# Altium PCB PCB3.PcbDoc
Units mil, origin at the board's own origin, x right, y up, seen from the top; angles counter-clockwise.
Board outline 4694.4 x 2114.4 mil, 2 copper layers (Top Layer, Bottom Layer); 41 components, 24 nets, 101 pads, 3 vias.
Unrouted connection lines stored in the file: 1.
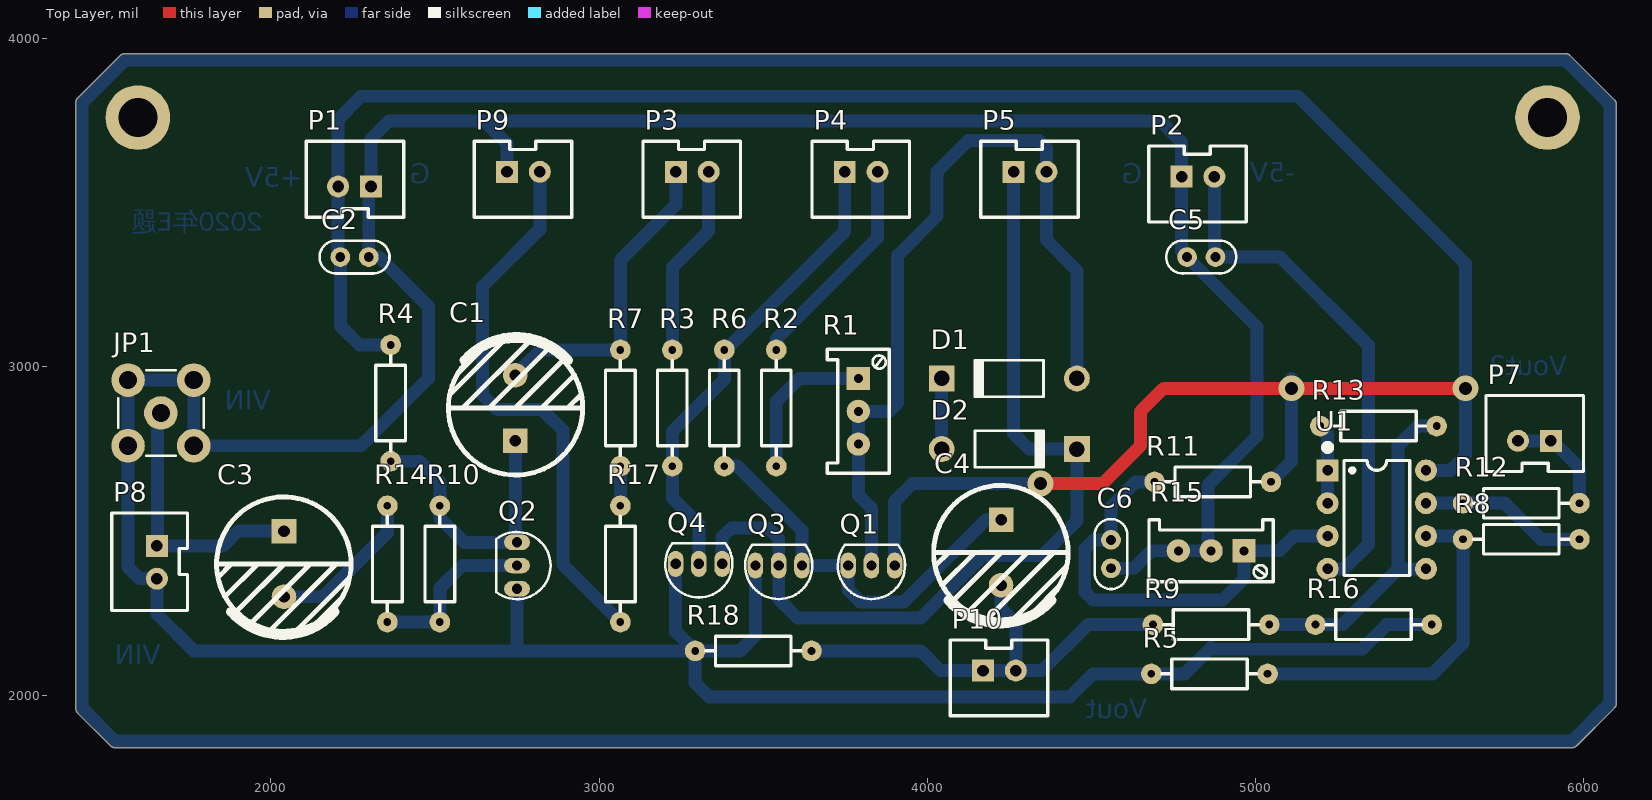
[diagram p0: Top Layer view]
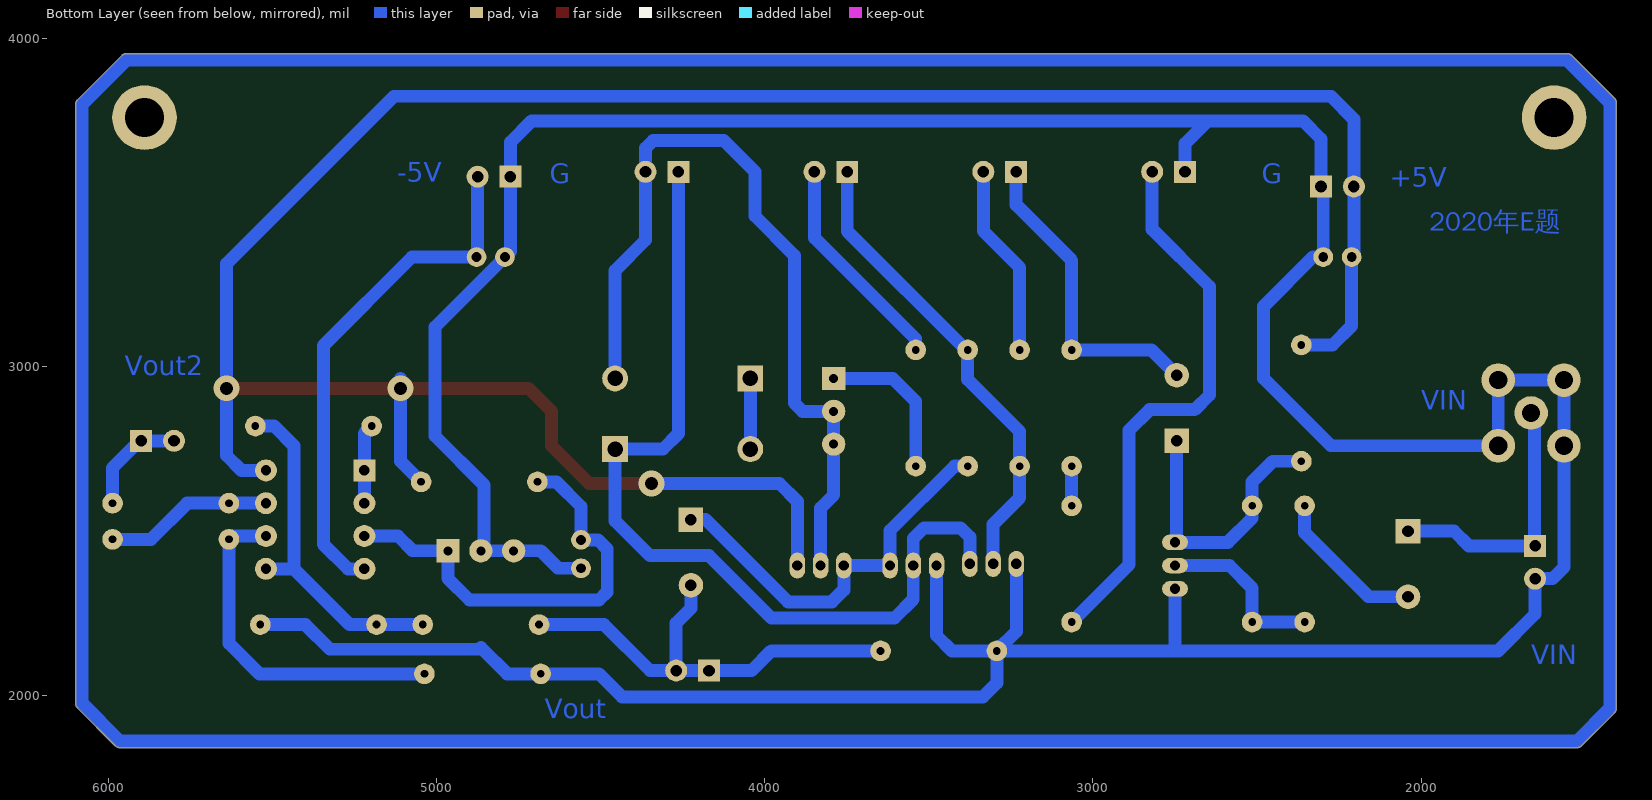
[diagram p1: Bottom Layer view, seen from below]
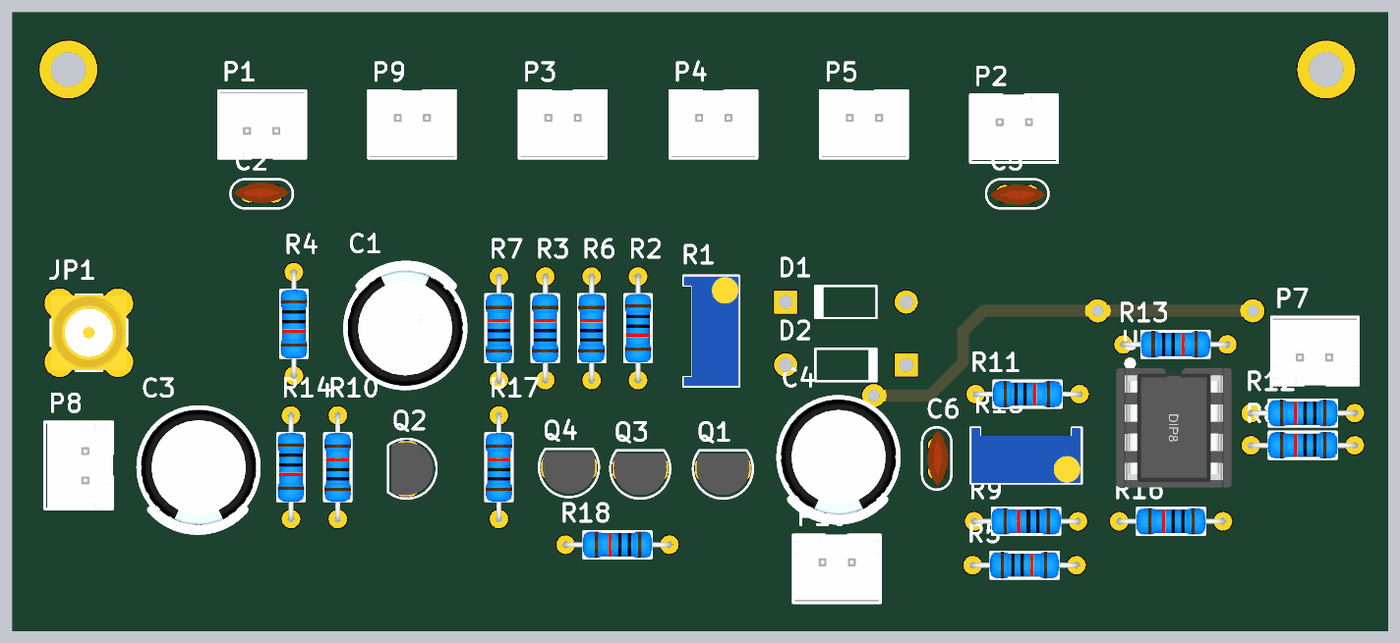
[diagram p2: 3D render of the assembled board from above, using the file's embedded part models]

## Layer stack, top to bottom
Top Solder: solder mask 0.4, Solder Resist, Dk 3.5
Top Layer: signal copper 1.4
Dielectric 1: dielectric 12.6, FR-4, Dk 4.8
Bottom Layer: signal copper 1.4
Bottom Solder: solder mask 0.4, Solder Resist, Dk 3.5

## Board outline
1511.08,1846.06 1411.06,1946.08 ccw(c1425,1960) 1411.08,1946.06 1411.07,1946.07 cw(c1425,1960) 1405.3,1960 1405.3,3805 cw(c1425,3805) 1411.07,3818.93 1411.06,3818.92 1541.08,3948.94 ccw(c1555,3935) 1541.06,3948.92 1541.07,3948.93 cw(c1555,3935) 1555,3954.7 5945,3954.7 cw(c5945,3935) 5958.93,3948.93 5958.92,3948.94 6093.94,3813.92 ccw(c6080,3800) 6093.92,3813.94 6093.93,3813.93 cw(c6080,3800) 6099.7,3800 6099.7,1975 cw(c6080,1975) 6093.93,1961.07 6093.94,1961.08 cw(c6080,1975) 6093.92,1961.06 6093.94,1961.08 5978.92,1846.06 ccw(c5965,1860) 5978.94,1846.08 5978.93,1846.07 cw(c5965,1860) 5965,1840.3 1525,1840.3 cw(c1525,1860) 1511.07,1846.07 1511.08,1846.06 cw(c1525,1860)

## Design rules (kind name [scope] priority, off if disabled: settings)
Clearance [All] p1: gap=10 ignorepadtopadclearanceinfootprint=FALSE except(0: Arc-Hole Track-Hole SMDPad-Hole THPad-Hole Via-Hole Fill-Hole Poly-Hole Region-Hole Text-Hole)
PolygonConnect [All] p1: connectstyle=Relief reliefconductorwidth=10 reliefentries=4 polygonreliefangle="90 Angle" airgapwidth=10
RoutingVias [All] p1: holewidth=28 width=50 viastyle="Through Hole" minholewidth=28 minwidth=50 maxholewidth=28 maxwidth=50
SolderMaskExpansion [All] p1: expansion=4
Width [All] p1: maxlimit=118.11 minlimit=39.37 preferedwidth=59.06
30 further rules are at their usual default settings.

## Components (designator, comment, footprint, x,y, rotation, side; value= is the part's Value field where it differs from the comment)
C1 "10uf" "CAP 5.0*10*16 - BK" 2745,2875 r90 top value=100pF
C2 "104" "CC 2.2*5" 2255,3335 r180 top value=100pF
C3 "10uf" "CAP 5.0*10*16 - BK" 2040,2400 r270 top value=100pF
C4 "10uF" "CAP 5.0*10*16 - BK" 4225,2435 r270 top value=100pF
C5 "104" "CC 2.2*5" 4835,3335 r0 top value=100pF
C6 "104" "CC 2.2*5" 4560,2430 r90 top value=100pF
D1 "Diode 1N4007" DO-41 4250,2965 r180 top
D2 "Diode 1N4007" DO-41 4250,2750 r0 top
JP1 "SMA WIFI 天线接口" SMA-KE-LI 1665,2860 r90 top
P1 "Header 2" XH2.54-LI-2P 2255,3550 r180 top
P2 "Header 2" XH2.54-LI-2P 4825,3580 r0 top
P3 "Header 2" XH2.54-LI-2P 3284.12,3594.7 r0 top
P4 "Header 2" XH2.54-LI-2P 3798.68,3594.7 r0 top
P5 "Header 2" XH2.54-LI-2P 4313.24,3594.7 r0 top
P7 "Header 2" XH2.54-LI-2P 5850,2775 r180 top
P8 "Header 2" XH2.54-LI-2P 1652.82,2405 r270 top
P9 "Header 2" XH2.54-LI-2P 2769.56,3594.7 r0 top
P10 "Header 2" XH2.54-LI-2P 4220,2075 r0 top
Q1 "NPN" TO92 3830,2395 r180 top
Q2 "NPN" TO92 2750,2395 r270 top
Q3 "PNP" TO92 3547.5,2395 r180 top
Q4 "NPN" TO92 3304.13,2400 r180 top
R1 "5K" 3296W 3790,2865 r270 top value=1K
R2 "1000k" AXIAL0.4-1/4W 3540,2875 r270 top value=1K
R3 "30K" AXIAL0.4-1/4W 3223.33,2875 r90 top value=1K
R4 "2k" AXIAL0.4-1/4W 2365,2890 r270 top value=1K
R5 "10k" AXIAL0.4-1/4W 4860,2065 r0 top value=1K
R6 "200k" AXIAL0.4-1/4W 3381.67,2875 r90 top value=1K
R7 "30k" AXIAL0.4-1/4W 3065,2875 r90 top value=1K
R8 "10k" AXIAL0.4-1/4W 5810,2475 r180 top value=1K
R9 "1k" AXIAL0.4-1/4W 4865,2215 r180 top value=1K
R10 "200k" AXIAL0.4-1/4W 2515,2400 r90 top value=1K
R11 "20k" AXIAL0.4-1/4W 4870,2650 r0 top value=1K
R12 "1k" AXIAL0.4-1/4W 5810,2585 r180 top value=1K
R13 "2K" AXIAL0.4-1/4W 5375,2820 r0 top value=1K
R14 "2K" AXIAL0.4-1/4W 2355,2400 r270 top value=1K
R15 "10k" 3296W 4865,2440 r180 top value=1K
R16 "2K" AXIAL0.4-1/4W 5360,2215 r180 top value=1K
R17 "100k" AXIAL0.4-1/4W 3065,2400 r90 top value=1K
R18 "2K" AXIAL0.4-1/4W 3470,2135 r180 top value=1K
U1 "TL082IDR" DIP8-300_MH 5370,2535 r0 top

## Footprints (in the part's own frame and the unit in brackets; to place one, negate y for a bottom-side part, rotate by r counter-clockwise, add the part's x,y. Pads: shape width x height; smd on the part's side, far side on the other; paste and mask are expansions set on the pad)
3296W [mm] "Precise Multi-Winding Adjustable Resistor"
  rect 1.8x1.8 hole 0.7: 1(-2.54,0)
  round 1.8 hole 0.7: 2(0,0) 3(2.54,0)
  silkscreen extent -4.8,-2.4 4.8,2.4, body extent -4.75,-2.4 4.75,2.4, height 2.9
AXIAL0.4-1/4W [mm] "脚距9mm，直径2.3mm"
  round 1.6 hole 0.6: 1(-4.5,0) 2(4.5,0)
  silkscreen extent -3.68,-1.14 3.68,1.14, body extent -4.72,-1.16 4.73,1.16, height 2.32
"CAP 5.0*10*16 - BK" [mm] "脚距5mm直径10mm高度16mm"
  rect 1.9x1.9 hole 0.9: 1(-2.54,0)
  round 1.9 hole 0.9: 2(2.54,0)
  silkscreen extent -5.19,-5.21 5.51,5.19, body extent -4.99,-5 5.02,5, height 16.26
"CC 2.2*5" [mil] "脚距2.2mm直径5mm      淘宝ID:黄晶宝石"
  round 60 hole 30: 1(-43.31,0) 2(43.31,0)
  silkscreen extent -107,-50 107,50, body extent -94,-40 95,32, height 194
DIP8-300_MH [mm] "带底座 9.4*7.6*3.8(长宽高）"
  rect 1.7x1.7 hole 0.8: 1(-3.81,3.81)
  round 1.7 hole 0.8: 2(-3.81,1.27) 3(-3.81,-1.27) 4(-3.81,-3.81) 5(3.81,-3.81) 6(3.81,-1.27) 7(3.81,1.27) 8(3.81,3.81)
  silkscreen extent -4.06,-4.32 2.54,5.84, body extent -5,-5.19 5,5.19, height 7.7
DO-41 [mm] "Diode, Axial; Body 5.2 x 2.7 mm (LxDia. max), Lead Dia. 0.86 mm (max)"
  round 2 hole 1.2: 1(-5.23,0)
  rect 2x2 hole 1.2: 2(5.23,0)
  silkscreen extent -2.65,-1.4 2.75,1.4
SMA-KE-LI [mm] "SMA 立式直插射频天线座     淘宝ID:黄晶宝石"
  round 2.6 hole 1.4 unplated: 1(0,0) 2(-2.54,-2.54) 2(2.54,-2.54) 3(-2.54,2.54) 3(2.54,2.54)
  silkscreen extent -3.3,-3.3 3.3,3.3, body extent -3.25,-3.25 3.25,3.25, height 10.35
TO92 [mm] "TO, Flat Index; 3 In-Line, Axial Leads; Body Dia. 4.8mm; Leads 0.48 x 0.5 mm (max)"
  oval 1.2x2 hole 0.8: 1(-1.8,0) 2(0,0) 3(1.8,0)
  silkscreen extent -2.6,-1.6 2.6,2.6, body extent -2.3,-1.3 2.3,2.3, height 7.6
XH2.54-LI-2P [mm] "接插件，2P"
  rect 1.7x1.7 hole 0.9: 1(-1.27,0)
  round 1.7 hole 0.9: 2(1.27,0)
  silkscreen extent -3.81,-3.51 3.74,2.37, body extent -3.77,-3.3 3.77,2.4, height 7.05

## Part data
C1 C3 C4: library part "Cap Pol1", "Polarized Capacitor (Radial)", LatestRevisionDate=17-Jul-2002, LatestRevisionNote="Re-released for DXP Platform.", PackageDescription="Polarized Capacitor (Radial); 2 Leads", PackageReference=RB7.6-15, Published=8-Jun-2000, Publisher="Altium Limited"
C2 C5 C6: library part Cap, "Capacitor", LatestRevisionDate=17-Jul-2002, LatestRevisionNote="Re-released for DXP Platform.", PackageDescription="Radial Cap, Thru-Hole; 2 Leads; 0.3 in Pin Spacing", PackageReference=RAD-0.3, Published=8-Jun-2000, Publisher="Altium Limited"
D1 D2: "1 Amp General Purpose Rectifier", Code_JEDEC=DO-204-AL, ComponentLink1Description="Manufacturer Link", ComponentLink1URL=http://www.fairchildsemi.com/, ComponentLink2Description=Datasheet, ComponentLink2URL=http://www.fairchildsemi.com/ds/1N%2F1N4001.pdf, DatasheetVersion=1998, LatestRevisionDate=17-Jul-2002, LatestRevisionNote="Re-released for DXP Platform.", PackageDescription="Diode, Axial; Body 5.2 x 2.7 mm (LxDia. max), Lead Dia. 0.86 mm (max)", PackageReference=DO-41, PackageVersion=Aug-1999, Published=8-Jun-2000, Publisher="Altium Limited"
JP1: library part SMA, "SMA-2.4G射频天线接口"
P1 P2 P3 P4 P5 P7 P8 P9 P10: "Header, 2-Pin", LatestRevisionDate=17-Jul-2002, LatestRevisionNote="Re-released for DXP Platform.", Publisher="Altium Limited"
Q1 Q2 Q4: "NPN Bipolar Transistor", Code_JEDEC=TO-226-AA, LatestRevisionDate=17-Jul-2002, LatestRevisionNote="Re-released for DXP Platform.", PackageDescription="TO, Flat Index; 3 In-Line, Axial Leads; Body Dia. 4.8mm; Leads 0.55 x 0.51 mm (max)", PackageReference=TO-226-AA, Published=8-Jun-2000, Publisher="Altium Limited"
Q3: "PNP Bipolar Transistor", LatestRevisionDate=29-May-2009, LatestRevisionNote="IPC-7351 Footprint Added.", PackageDescription="3-Pin SOT-23 Package 0.95 mm Pitch, 2.4 mm Lead Span", PackageReference=SOT-23B, PackageVersion=Aug-1999, Published=8-Jun-2000, Publisher="Altium Limited"
R1 R15: library part "Res Tap", "Tapped Resistor", LatestRevisionDate=17-Jul-2002, LatestRevisionNote="Re-released for DXP Platform.", PackageDescription="Variable Resistor, Thru-Hole; 3 Leads", PackageReference=VR3, Published=24-Mar-1999, Publisher="Altium Limited", Set Position=0.5, Sim Note="Enter the Resistance value and the set point into parameter fields."
R2 R3 R4 R5 R6 R7 R8 R9 R10 R11 R12 R13 R14 R16 R17 R18: library part Res2, "Resistor", LatestRevisionDate=17-Jul-2002, LatestRevisionNote="Re-released for DXP Platform.", PackageDescription="Axial Device, Thru-Hole; 2 Leads; 0.4 in Pin Spacing", PackageReference=AXIAL-0.4, Published=8-Jun-2000, Publisher="Altium Limited"
U1: "Num:C6966"

## Free pads (board coordinates)
  round 196.85 hole 118.11: 1(1595,3760) 2(1595,3760) 3(5890,3760) 4(5890,3760)

## Via types
v1: diameter 78.74, hole 39.37, Top Layer to Bottom Layer, 3 vias

## Nets (pads, with @x,y where several pads share a name; then routed paths per layer and width w, separated by ;. In a path a pad name is that pad's centre, name@x,y a point inside that pad or via, vN(x,y) a via of type N, cw(c..) or ccw(c..) an arc to the next point about the centre after c; other vN are vias at no path point)
+5V: C2.2 P1.2 Q1.1 R4.1 R11.2 U1.8 | length 7708.7
  Top Layer w39.37: v1(4345,2645) 4535,2645 4650,2760 4650,2865 4720,2935 v1(5110,2935) v1(5640,2935)
  Bottom Layer w39.37: R4.1 2270,3067.17 2211.69,3125.47 C2.2 2205,3341.69 P1.2 2205,3755 2275,3825 5130,3825 5640,3315 v1(5640,2935) 5640,2730 5595,2685 U1.8 ; Q1.1 3900.87,2590.87 3955,2645 v1(4345,2645) v1@4365,2645 ; R11.2 5110,2712.83 v1(5110,2935) v1@5110,2965
-5V: C5.2 P2.2 U1.4 | length 1586
  Bottom Layer w39.37: P2.2 4875,3338.31 C5.2 5075,3335 5345,3065 5345,2460 5270,2385 U1.4
GND: C2.1 C5.1 C6.1 JP1.2 JP1.3 P1.1 P2.1 P8.2 P9.1 Q2.3 Q3.3 Q4.3 R5.1 R15.2 R15.3 R16.1 R18.2 | length 12283.7
  Bottom Layer w39.37: P9.1 2719.56,3680.44 2650,3750 ; Q2.3 2750,2135 ; Q4.3 3233.27,2194.57 R18.2 ; Q3.3 3476.63,2181.63 3430,2135 R18.2 ; C6.1 4629.53,2386.69 4682.83,2440 R15.3 R15.2 4855,2450 4855,2640 5005,2790 5005,3121.69 C5.1 4775,3351.69 P2.1 4775,3685 4710,3750 2650,3750 ; 4865,2145 4860,2140 ; R16.1 5400,2215 5325,2140 4860,2140 ; 2650,3750 2360,3750 2305,3695 P1.1 2298.31,3543.31 C2.1 2330,3335 2480,3185 2480,2965 2275,2760 1765,2760 1765,2960 1565,2960 1565,2760 1565,2390 1600,2355 P8.2 1652.82,2247.18 1765,2135 2750,2135 ; 2750,2135 R18.2 ; R18.2 3292.83,2037.17 3335,1995 4435,1995 4505,2065 R5.1 4785,2065 4860,2140
NetC1_1: C1.1 Q2.1 R4.2 R10.2 | length 862.9
  Bottom Layer w39.37: R4.2 2452.17,2712.83 2515,2650 R10.2 2515,2540 2589.13,2465.87 Q2.1 2745,2470.87 C1.1
NetC1_2: C1.2 P3.1 R7.2 | length 964.5
  Bottom Layer w39.37: C1.2 2822.17,3052.17 R7.2 3065,3325 3234.12,3494.12 P3.1
NetC3_1: C3.1 JP1.1 P8.1 | length 815.9
  Bottom Layer w39.37: JP1.1 1655,2850 1655,2457.18 P8.1 1855,2455 1900,2500 C3.1
NetC3_2: C3.2 R14.1 | length 477.9
  Bottom Layer w39.37: C3.2 2160,2300 2355,2495 R14.1
NetC4_1: C4.1 Q1.3 Q3.1 R6.1 | length 1224.3
  Bottom Layer w39.37: R6.1 3422.17,2697.83 3618.37,2501.63 Q3.1 Q1.3 3759.13,2320.87 3795.63,2284.37 3929.37,2284.37 4180,2535 C4.1
NetC4_2: C4.2 P10.1 P10.2 R9.2 R18.1 | length 1402.2
  Bottom Layer w39.37: R18.1 3980,2135 4040,2075 P10.1 P10.2 ; C4.2 4225,2265 4270,2220 P10.2 ; R9.2 4490,2215 4350,2075 P10.2
NetC6_2: C6.2 R11.1 R15.1 U1.3 | length 1368.2
  Bottom Layer w39.37: R11.1 4635,2650 4560,2575 C6.2 4508.31,2473.31 4480,2445 4480,2315 4505,2290 4900,2290 4965,2355 R15.1 5072.83,2440 5117.83,2485 U1.3
NetD1_1: D1.1 P5.2 Q1.2 R1.2 R1.3 | length 2494
  Bottom Layer w39.37: Q1.2 3830,2570 3790,2610 R1.3 R1.2 3885,2865 3910,2890 3910,3340 4030,3460 4030,3595 4125,3690 4340,3690 4363.24,3666.76 P5.2 4363.24,3386.76 4455.91,3294.09 D1.1
NetD1_2: D1.2 D2.1 | length 215
  Bottom Layer w39.37: D2.1 D1.2
NetD2_2: D2.2 P5.1 Q3.2 Q4.1 | length 2748.2
  Bottom Layer w39.37: Q4.1 3375,2481.63 3403.37,2510 3515,2510 3547.5,2477.5 Q3.2 3547.5,2292.5 3605,2235 3980,2235 4170,2425 4350,2425 4455.91,2530.91 D2.2 4310,2750 4263.24,2796.76 P5.1
NetP3_2: P3.2 R3.2 | length 588.4
  Bottom Layer w39.37: R3.2 3223.33,3303.33 3334.12,3414.12 P3.2
NetP4_1: P4.1 Q4.2 R3.1 R6.2 R7.1 R17.2 | length 1569.7
  Bottom Layer w39.37: R17.2 R7.1 ; Q4.2 3304.13,2520.87 3223.33,2601.67 R3.1 3223.33,2803.33 3381.67,2961.67 R6.2 3387.17,3052.17 3748.68,3413.68 P4.1
NetP4_2: P4.2 R2.1 | length 670.4
  Bottom Layer w39.37: R2.1 3540,3085 3848.68,3393.68 P4.2
NetP7_1: P7.1 P7.2 R12.1 | length 329
  Bottom Layer w39.37: P7.2 P7.1 5905,2775 5987.17,2692.83 R12.1
NetP9_2: P9.2 R17.1 | length 1698.5
  Bottom Layer w39.37: P9.2 2819.56,3419.56 2645,3245 2645,2915 2690,2870 2827.17,2870 2890,2807.17 2890,2397.83 R17.1
NetQ2_2: Q2.2 R10.1 R14.2 | length 526.7
  Bottom Layer w39.37: R14.2 R10.1 2515,2325.87 2584.13,2395 Q2.2
NetR1_1: R1.1 R2.2 | length 476.2
  Bottom Layer w39.37: R2.2 3540,2895 3610,2965 R1.1
NetR5_2: R5.2 R8.2 U1.6 | length 1068.3
  Bottom Layer w39.37: R5.2 5540,2065 5632.83,2157.83 R8.2 5622.83,2485 U1.6
NetR8_1: R8.1 R12.2 U1.7 | length 512.7
  Bottom Layer w39.37: U1.7 R12.2 5760,2585 5870,2475 R8.1
NetR9_1: R9.1 R13.2 R16.2 U1.5 | length 1065.3
  Bottom Layer w39.37: R9.1 R16.2 5265,2215 5435,2385 ; U1.5 5435,2385 ; R13.2 5495,2820 5435,2760 5435,2385
NetR13_1: R13.1 U1.1 U1.2 | length 244.2
  Bottom Layer w39.37: R13.1 5220,2797.83 U1.1 U1.2
copper on no net: | length 13213
  Bottom Layer w39.37: 1755,3935 5945,3935 ; 1775,3935 1555,3935 1425,3805 1425,1960 1525,1860 5965,1860 6080,1975 6080,3800 5945,3935 ; 5955,3925 5945,3935

## Other copper
Bottom Layer:
  text "-5V" at 5120,3545 h100
  text "G" at 2485,3540 h100
  text "G" at 4655,3540 h100
  text "+5V" at 2095,3530 h100
  text "2020年E题" at 1975,3395 h100
  text "Vout2" at 5950,2955 h100
  text "VIN" at 2000,2850 h100
  text "VIN" at 1665,2075 h100
  text "Vout" at 4670,1910 h100